# Altium PCB PCB_MachMQ3.PcbDoc
Units mil, origin at the board's own origin, x right, y up, seen from the top; angles counter-clockwise.
Board outline 1880 x 3625 mil, 2 copper layers (Top Layer, Bottom Layer); 27 components, 21 nets, 108 pads, 9 vias.
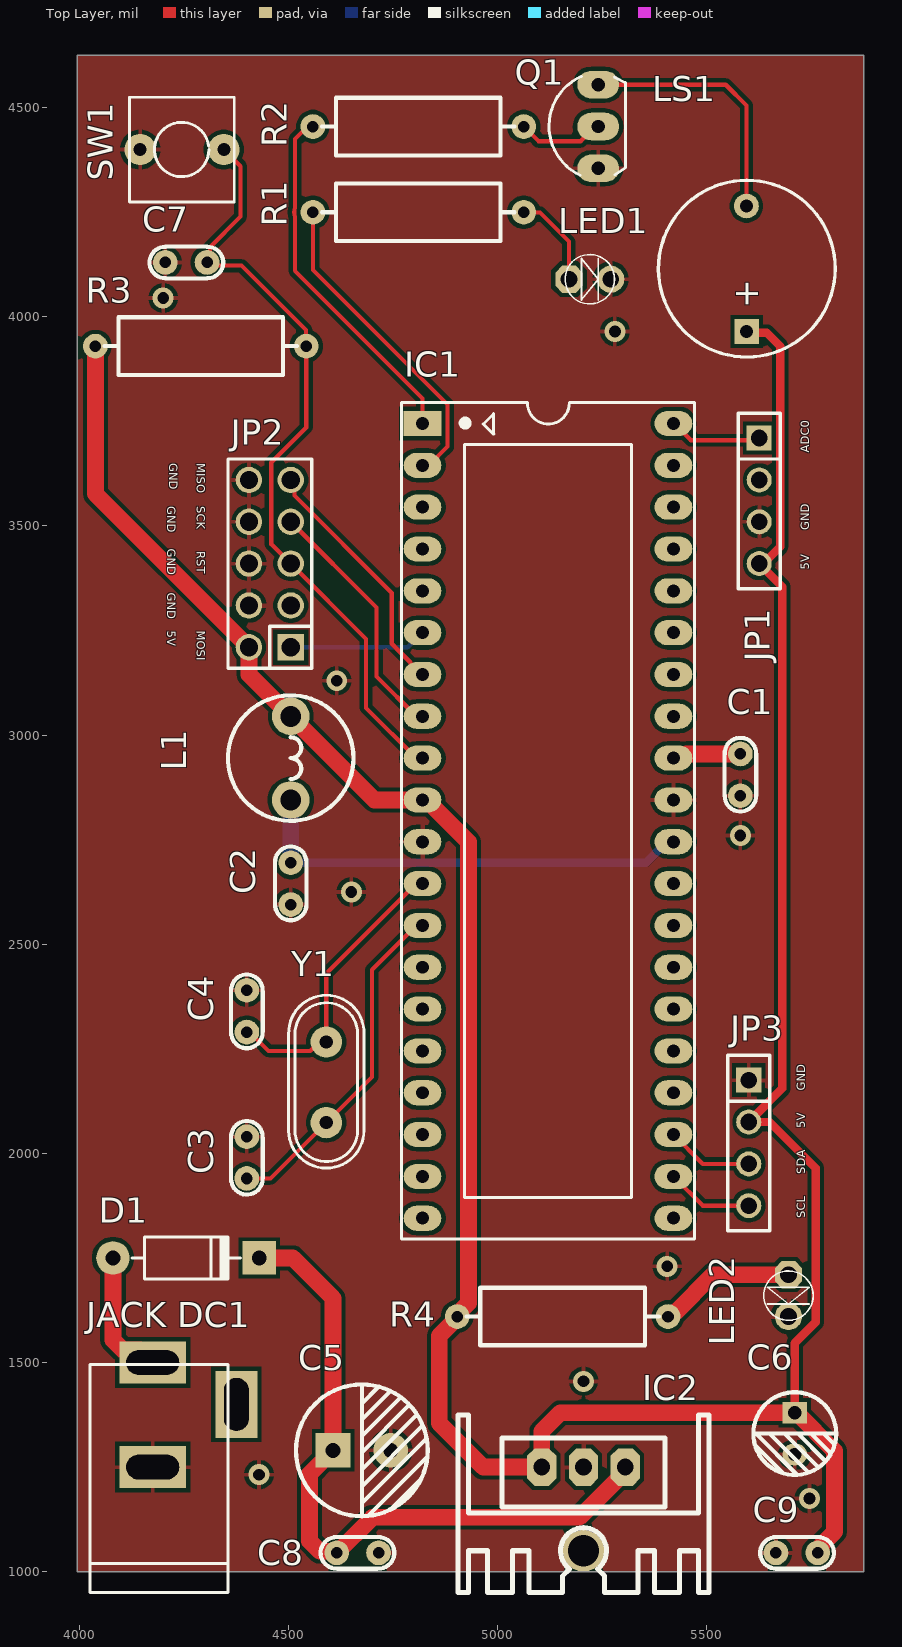
[diagram p0: Top Layer view]
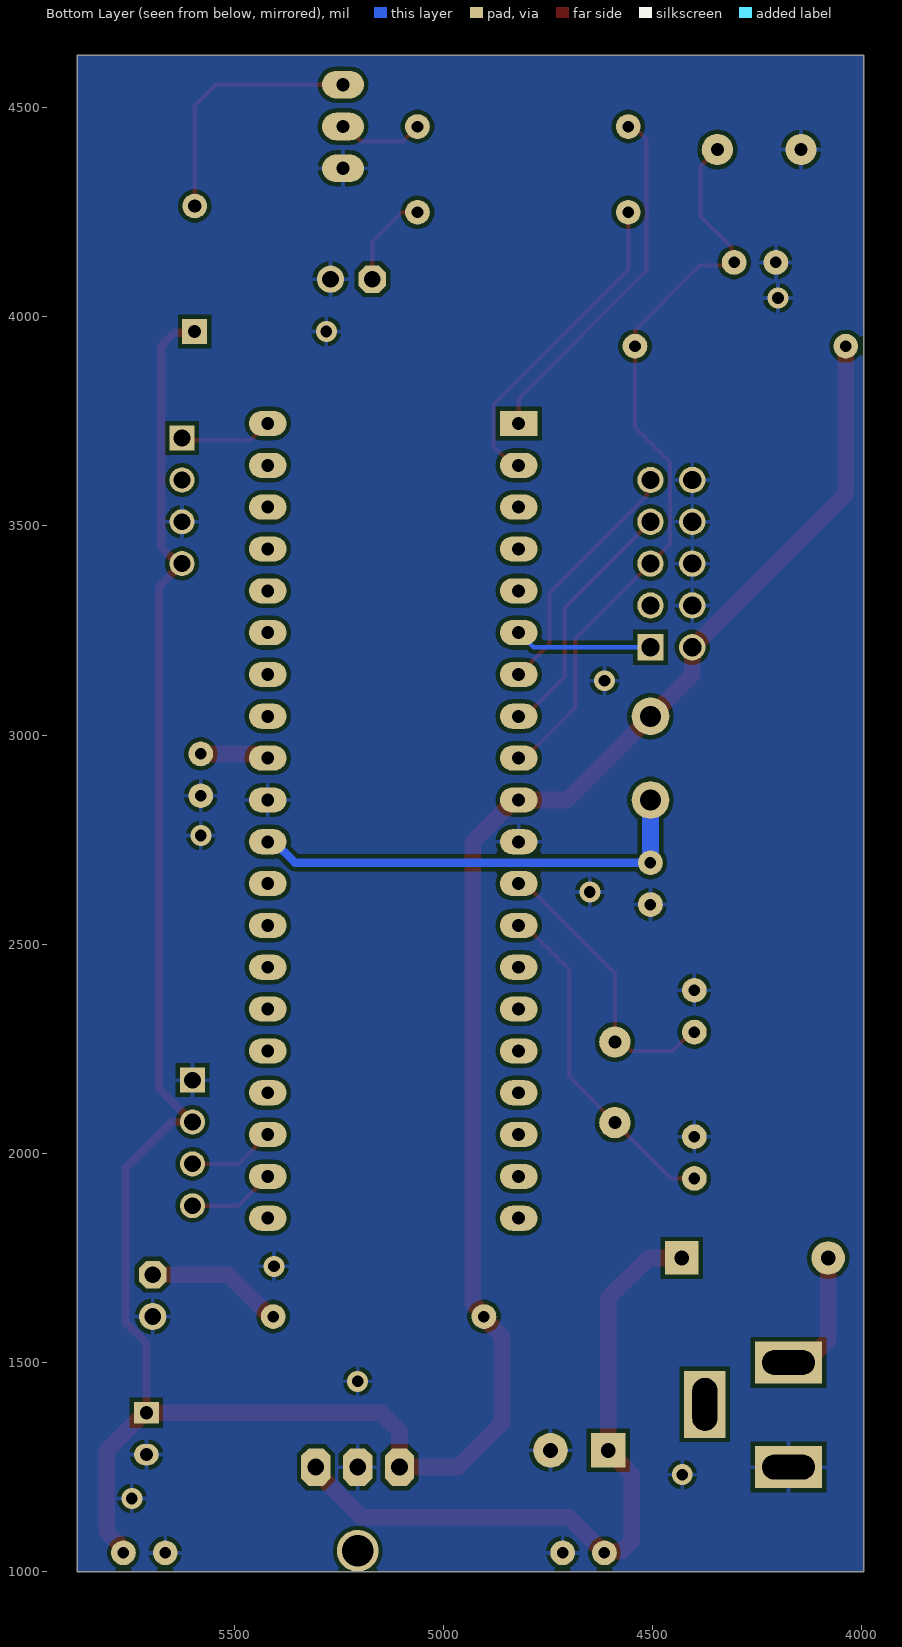
[diagram p1: Bottom Layer view, seen from below]
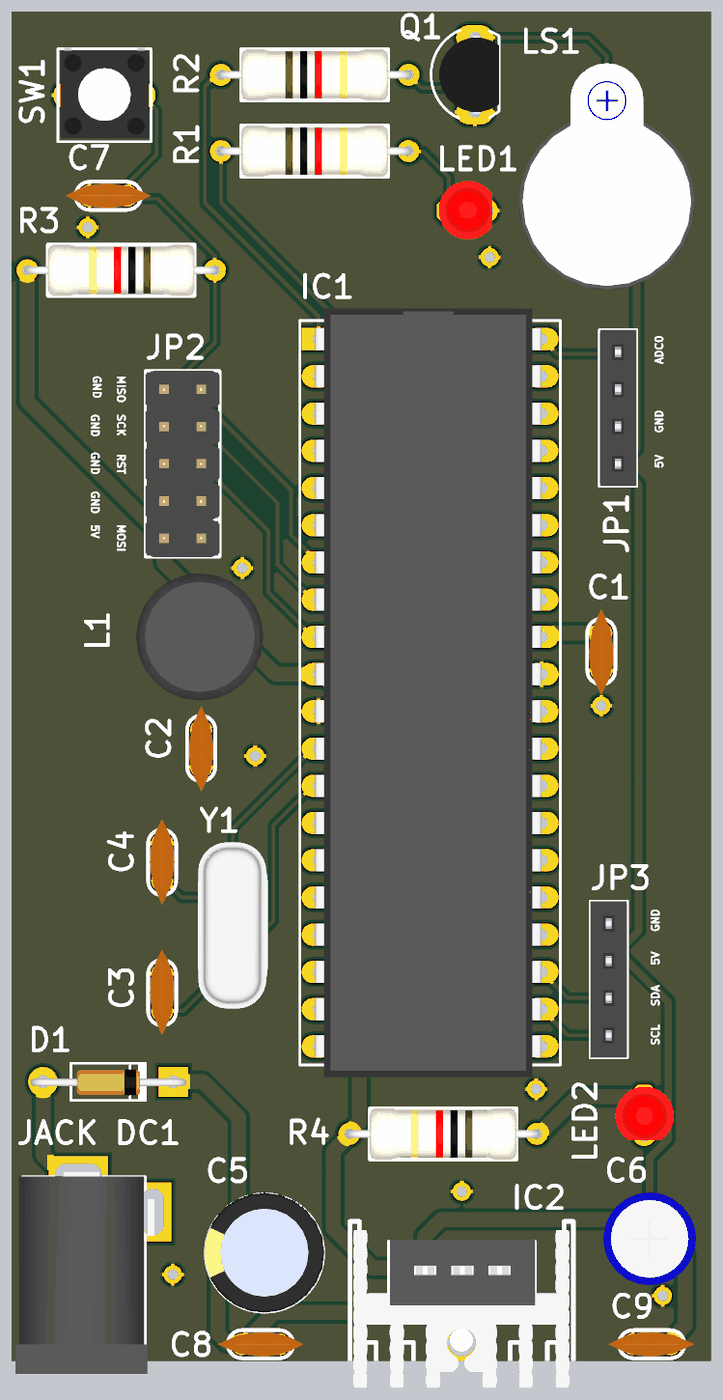
[diagram p2: 3D render of the assembled board from above, using the file's embedded part models]

## Layer stack, top to bottom
Top Solder: solder mask 0.4, Solder Resist, Dk 3.5
Top Layer: signal copper 1.4
Dielectric 1: dielectric 12.6, FR-4, Dk 4.8
Bottom Layer: signal copper 1.4
Bottom Solder: solder mask 0.4, Solder Resist, Dk 3.5

## Board outline
3995,1000 5875,1000 5875,4625 3995,4625

## Design rules (kind name [scope] priority, off if disabled: settings)
Clearance [All] p1: gap=10 ignorepadtopadclearanceinfootprint=FALSE
PolygonConnect [All] p1: connectstyle=Relief reliefconductorwidth=10 reliefentries=4 polygonreliefangle="90 Angle" airgapwidth=10
RoutingVias [All] p1: holewidth=15 width=30 viastyle="Through Hole" minholewidth=10 minwidth=20 maxholewidth=28 maxwidth=50
SolderMaskExpansion [All] p1: expansion=4 istentingtop=FALSE
SupplyNets "Schematic Supply Nets_1" [InNet('GND')] p1: voltage=0.000
SupplyNets "Schematic Supply Nets" [InNet('5V')] p2: voltage=0.000
Width [All] p1: maxlimit=40 minlimit=10 preferedwidth=20 minimp=50.000000 maximp=50.000000 favimp=50.000000
30 further rules are at their usual default settings.

## Components (designator, comment, footprint, x,y, rotation, side; value= is the part's Value field where it differs from the comment)
C1 "104" "tu gom" 5580,2905 r270 top
C2 "104" "tu gom" 4505,2645 r270 top
C3 "22pF" "tu gom" 4400,1990 r90 top
C4 "22pF" "tu gom" 4400,2340 r90 top
C5 "470uF" "tu hoa 8mm" 4675,1290 r0 top
C6 "47uF" "tu hoa 5mm" 5710,1330 r270 top
C7 "104" "tu gom" 4255,4130 r180 top
C8 "104" "tu gom" 4665,1045 r0 top
C9 "104" "tu gom" 5715,1045 r180 top
D1 "1N4007" D1A 4080,1750 r180 top
IC1 "ATMEL 16A" DIP40/W0.6 4820,3745 r270 top value="Atmega 16L"
IC2 "LM7805" QTO-220H3 5305,1250 r180 top
"JACK DC1" "JACK DC 5.5" "JACK DC 5.5" 4275,1375 r90 top value="Jac DC"
JP1 "JP 1x4 2.54" "JP 1x4 CT" 5625,3710 r270 top
JP2 "JP 2x5 2.54" "JP 2x5 DT" 4455,3410 r90 top
JP3 "JP 1x4 2.54" "JP 1x4 CT" 5600,2175 r270 top
L1 "100uH 3A" "CUON CAM 100uH3A" 4505,2945 r270 top
LED1 "LED" LED-3MM-RED 5170,4090 r0 top value="LED 3 ly Single Colour"
LED2 "LED" LED-3MM-RED 5695,1710 r270 top value="LED 3 ly Single Colour"
LS1 "Coi Chip Speaker" "Coi Chip Speacker" 5595,3965 r90 top
Q1 "2N222" TO92-123 5240,4455 r90 top value=C1815
R1 "330R" "tro vach 1/2w" 4810,4250 r0 top
R2 "1k" "tro vach 1/2w" 4810,4455 r0 top
R3 "10k" "tro vach 1/2w" 4290,3930 r180 top
R4 "330R" "tro vach 1/2w" 5155,1610 r180 top
SW1 "SW" SW2 4145,4400 r0 top value="SW chip 2 pin"
Y1 "16Mhz" "Thach Anh 2 chan cam" 4590,2170 r270 top value=4Mhz

## Footprints (in the part's own frame and the unit in brackets; to place one, negate y for a bottom-side part, rotate by r counter-clockwise, add the part's x,y. Pads: shape width x height; smd on the part's side, far side on the other; paste and mask are expansions set on the pad)
"Coi Chip Speacker" [mm]
  rect 1.5x1.5 hole 0.8: 1(0,0)
  round 1.5 hole 0.8: 2(7.62,0.013)
  silkscreen extent -1.55,-5.38 9.18,5.36, body extent -2.22,-6 13.24,6, height 4.5
"CUON CAM 100uH3A" [mil] "100uH3A"
  round 90 hole 50: 1(-100,0) 2(100,0)
  silkscreen extent -150,-150 150,150, body extent -171,-175 171,167, height 394
D1A [mil] "Diode 1A, W 100mil, L 350mil"
  round 80 hole 35: 1(0,0)
  rect 80x80 hole 35: 2(-350,0)
  silkscreen extent -305,-50 -45,50, body extent -386,-33 34,36, height 84
DIP40/W0.6 [mil] "40 PIN, W 600mil, Pin to pin 100mil"
  rect 60x90 hole 31: 1(0,0)
  oval 60x90 hole 31: 2(100,0) 3(200,0) 4(300,0) 5(400,0) 6(500,0) 7(600,0) 8(700,0) 9(800,0) 10(900,0) 11(1000,0) 12(1100,0) 13(1200,0) 14(1300,0) 15(1400,0) 16(1500,0) 17(1600,0) 18(1700,0) 19(1800,0) 20(1900,0) 21(1900,600) 22(1800,600) 23(1700,600) 24(1600,600) 25(1500,600) 26(1400,600) 27(1300,600) 28(1200,600) 29(1100,600) 30(1000,600) 31(900,600) 32(800,600) 33(700,600) 34(600,600) 35(500,600) 36(400,600) 37(300,600) 38(200,600) 39(100,600) 40(0,600)
  silkscreen extent -50,-50 1950,650, body extent -82,-10 1982,600, height 224
"JACK DC 5.5" [mil] "Jac DC input"
  rect 100x160 hole 59.06 slot 125.98 at 90 deg: 1(125,100) 2(-125,100)
  rect 160x100 hole 59.06 slot 125.98 at 0 deg: 3(25,-100)
  silkscreen extent -425,-80 120,250, body extent -410,-105 134,269, height 434
"JP 1x4 CT" [mm]
  rect 1.52x1.52 hole 1.02: 1(0,0)
  round 1.52 hole 1.02: 2(2.54,0) 3(5.08,0) 4(7.62,0)
  silkscreen extent -1.52,-1.27 9.14,1.27, body extent -1.52,-1.25 9.14,1.25, height 8.51
"JP 2x5 DT" [mm] "10 pins, dual pin, straight, gold plating"
  rect 1.6x1.6 hole 1.1: 1(-5.08,-1.27)
  round 1.6 hole 1.1: 2(-2.54,-1.27) 3(0,-1.27) 4(2.54,-1.27) 5(5.08,-1.27) 6(5.08,1.27) 7(2.54,1.27) 8(0,1.27) 9(-2.54,1.27) 10(-5.08,1.27)
  silkscreen extent -6.35,-2.54 6.35,2.54, body extent -6.35,-2.54 6.35,2.54, height 8.55
LED-3MM-RED [mil]
  oct 65x65 hole 40: 1(0,0)
  round 65 hole 40: 2(100,0)
  silkscreen extent -9,-59 109,59, body extent -27,-77 117,80, height 181
QTO-220H3 [mil] "TO-220 1-2-3"
  oct 70x90 hole 40: 1(0,0) 2(100,0) 3(200,0)
  round 100 hole 75: ""(100,200)
  silkscreen extent -200,-125 400,300, body extent -190,-102 392,323, height 984
SW2 [mil] "SW button 2pin, 250x 250 mil"
  round 75 hole 31: 1(0,0) 2(200,0)
  silkscreen extent -25,-125 225,125, body extent -18,-116 218,128, height 197
"Thach Anh 2 chan cam" [mm]
  round 1.905 hole 0.8: 1(-2.45,0) 2(2.45,0)
  silkscreen extent -5.28,-2.29 5.21,2.29, body extent -5.68,-2.36 5.68,2.29, height 3.5
TO92-123 [mil] "TO-92"
  oval 66x100 hole 32: 1(-100,0) 2(0,0) 3(100,0)
  silkscreen extent -117,-65 120,118, body extent -109,-66 109,95, height 245
"tro vach 1/2w" [mm]
  round 1.5 hole 0.7: 1(-6.4,0) 2(6.4,0)
  silkscreen extent -5.84,-1.75 5.84,1.75, body extent -6.62,-1.75 6.62,1.75, height 3.5
"tu gom" [mm] "Tu gom mini"
  round 1.5 hole 0.7: 1(-1.27,0) 2(1.27,0)
  silkscreen extent -2.25,-0.97 2.22,0.97, body extent -2.92,-0.85 2.92,0.85, height 6.12
"tu hoa 5mm" [mm]
  rect 1.3x1.5 hole 0.8: 1(-1.27,0)
  oval 1.3x1.5 hole 0.8: 2(1.27,0)
  silkscreen extent -2.51,-2.51 2.51,2.51, body extent -3.12,-3.18 3.23,3.18, height 14.55
"tu hoa 8mm" [mm]
  rect 2.1x2.1 hole 0.9: 1(-1.75,0)
  round 2.1 hole 0.9: 2(1.75,0)
  silkscreen extent -4,-4 4,4, body extent -4.1,-4.07 4.1,4.13, height 13.81

## Part data
C1 C2 C7 C8 C9: library part "Tu gom 104 50V", "Cắm", Chung_Loai=Cắm, Don_Vi=Con, Ma_Hang=MH004761, So_Chan=2, Ten_Linh_Kien="Tụ gốm 104 100nF 50V"
C3 C4: library part "Tu gom 22pF 50V", "Cắm", Chung_Loai=Cắm, Don_Vi=Con, Ma_Hang=MH004771, So_Chan=2, Ten_Linh_Kien="Tụ gốm 22P 50V"
C5: library part "Tu Hoa 470uF 16V 8x11", "Cắm", Chung_Loai=Cắm, Don_Vi=Con, Ma_Hang=MH006550, So_Chan=2, Ten_Linh_Kien="Tụ Hóa 470uF 16V 8x11MM"
C6: library part "Tu Hoa 47uF 16V 5x10", "Cắm", Chung_Loai=Cắm, Don_Vi=Con, Ma_Hang=MH006859, So_Chan=2, Ten_Linh_Kien="Tụ Hóa 47uF 16V"
D1: library part D1A, "Diode 1A"
IC1: library part ATmega16A-PU, "8-Bit AVR Microcontroller with 16K Bytes of In-System Programmable Flash Memory"
IC2: library part LM78xx, "On ap +, from + 5 to + 24VDC"
JP1 JP3: library part "JP 1x4 2.54 Cai Thang", "Cắm", Chung_Loai=Cắm, Don_Vi=Con, Ma_Hang=MH004006, Ten_Linh_Kien="Jump Đơn Cái 2.54MM 1x20P Thẳng"
JP2: library part "JP 2x5 2.54 Duc Thang", "Cắm", Chung_Loai=Cắm, Don_Vi=Con, Ma_Hang=MH002686, Ten_Linh_Kien="Jump Đôi Đực 2.54MM 2x40P Thẳng 11MM"
L1: library part "CUON CAM 100uH DIP", "Dán", Chung_Loai=Dán, Don_Vi=Con, Ma_Hang=MH002209, Ten_Linh_Kien="Cuộn Cảm 100uH 3A 8x10MM"
LED1 LED2: "LED Single colour Green and Red"
LS1: "Còi chip"
Q1: "NPN 600mW, ECB"
R1 R4: library part "Tro Vach 1/2W 5% 330R", "Cắm", Chung_Loai=Cắm, Don_Vi=Con, Ma_Hang=MH006204, So_Chan=2, Ten_Linh_Kien="Trở 5% 1/2w 330R"
R2: library part "Tro Vach 1/2W 5% 1k", "Cắm", Chung_Loai=Cắm, Don_Vi=Con, Ma_Hang=MH007240, So_Chan=2, Ten_Linh_Kien="Trở 5% 1/2w 1K"
R3: library part "Tro Vach 1/2W 5% 10k", "Cắm", Chung_Loai=Cắm, Don_Vi=Con, Ma_Hang=MH006206, So_Chan=2, Ten_Linh_Kien="Trở 5% 1/2w 10k"
SW1: library part SW2, "Switch button 2 pin"
Y1: library part "Thach Anh 2 chan Cam", "Crystal For all Crystal 2pin."

## Via types
v1: diameter 50, hole 28, Top Layer to Bottom Layer, 9 vias

## Nets (pads, with @x,y where several pads share a name; then routed paths per layer and width w, separated by ;. In a path a pad name is that pad's centre, name@x,y a point inside that pad or via, vN(x,y) a via of type N, cw(c..) or ccw(c..) an arc to the next point about the centre after c; other vN are vias at no path point)
5V: C6.1 C9.1 IC1.10 IC2.3 JP1.4 JP2.10 JP3.2 L1.1 LS1.1 R3.2 R4.2 | length 7278.9
  Top Layer w20: LS1.1 5597.81,3962.19 5642.81,3962.19 5674.92,3930.08 5674.92,3449.92 5635,3410 JP1.4 5680,3355 5680,2155 JP3.2 5650,2075 5760,1965 5760,1596.31 5710,1546.31 C6.1
  Top Layer w40: R3.2 4038.03,3576.97 JP2.10 4405,3145 4705,2845 IC1.10 4829.59,2845 4930,2744.59 4930,1642.12 4903.03,1615.16 R4.2 ; R4.2@4903.03,1606.81 4860,1563.77 4860,1355 4965,1250 IC2.3 5105,1335 5150,1380 C6.1 5713.94,1380 5805,1288.94 5805,1095.16 5774.53,1064.68 5774.53,1059.68 5760,1045.16 C9.1@5760,1045
ADC0: IC1.40 JP1.1 | length 227.8
  Top Layer w10: IC1.40 5421.47,3745 5461.47,3705 5610,3705 JP1.1@5625,3720
GND: "JACK DC1.2" C1.2 C2.2 C3.2 C4.2 C5.2 C6.2 C7.2 C8.2 C9.2 IC1.11 IC1.31 IC2.2 JP1.3 JP2.6 JP2.7 JP2.8 JP2.9 JP3.1 LED1.2 LED2.2 Q1.1 SW1.1
  other v1: 5745,1175 4428.95,1231.99 5205,1455 5405,1730 4650,2625 5580,2760 4615,3130 5280,3965 4200,4045
MISO: IC1.7 JP2.5 | length 596.3
  Top Layer w10: JP2.5 4513.65,3601.35 4513.65,3572.9 4746.55,3340 4746.55,3218.45 4790.68,3174.32 4790.68,3172.85 4818.53,3145 IC1.7
MOSI: IC1.6 JP2.1 | length 330.2
  Bottom Layer w10: JP2.1 4784.64,3210 4795.43,3220.79 4795.43,3221.9 4818.53,3245 IC1.6
NetC1_1: C1.1 IC1.32 | length 164.1
  Top Layer w40: IC1.32 5440.41,2945 5450.41,2955 C1.1
NetC2_1: C2.1 IC1.30 L1.2 | length 1094.7
  Top Layer w40: L1.2 L1.2@4511.35,2838.65
  Bottom Layer w20: C2.1 5355,2695 5405,2745 IC1.30
  Bottom Layer w40: C2.1 L1.2
NetC5_1: C5.1 C8.1 D1.2 IC2.1 | length 1677.1
  Top Layer w40: D1.2 4510,1750 4606.1,1653.9 C5.1 4550,1233.9 4550,1073.47 4574.83,1048.65 4611.35,1048.65 C8.1 4700,1130 5195,1130 5305,1240 IC2.1
NetD1_1: "JACK DC1.1" D1.1 | length 313.7
  Top Layer w40: D1.1 4080,1553.43 4103.43,1530 4145,1530 4175,1500
NetLED1_1: LED1.1 R1.2 | length 227
  Top Layer w10: R1.2 5062.61,4249.36 5100.64,4249.36 5170,4180 LED1.1
NetLED2_1: LED2.1 R4.1 | length 329.5
  Top Layer w40: R4.1 5412.12,1610 5421.65,1619.53 5424.53,1619.53 5515,1710 LED2.1
NetLS1_2: LS1.2 Q1.3 | length 615.5
  Top Layer w10: Q1.3 5545,4555 5594.5,4505.5 LS1.2
NetQ1_2: Q1.2 R2.2 | length 207
  Top Layer w10: R2.2 5096.97,4420 5198.4,4420 5233.4,4455 Q1.2
PB0: IC1.1 R2.1 | length 860.1
  Top Layer w10: R2.1@4535.61,4445.61 4515,4425 4515,4261.45 ccw(c4558.03,4250) 4515,4238.55 4515,4110 4517.93,4107.07 4820,3805 IC1.1 ; R2.1@4535.63,4445.62 R2.1
PB1: IC1.2 R1.1 | length 772
  Top Layer w10: R1.1 4558.03,4111.97 4880,3790 4880,3690 4835,3645 IC1.2
RESET: C7.1 IC1.9 JP2.3 R3.1 SW1.2 | length 1839.9
  Top Layer w10: SW1.2 4385,4360 4385,4239.79 4311.59,4166.38 4311.59,4136.59 C7.1 4312.56,4122.44 4387.56,4122.44 4541.33,3968.67 4541.33,3930.64 R3.1 4541.97,3735.51 4458.5,3652.05 4458.5,3456.5 JP2.3 4685,3230 4685,3065 4805,2945 IC1.9
SCK: IC1.8 JP2.4 | length 604.3
  Top Layer w10: JP2.4 4710,3305 4710,3140 4805,3045 IC1.8
SCL: IC1.22 JP3.4 | length 209
  Top Layer w10: IC1.22 5490,1875 JP3.4
SDA: IC1.23 JP3.3 | length 209
  Top Layer w10: IC1.23 5490,1975 JP3.3
XTAL1: C3.1 IC1.13 Y1.2 | length 820.8
  Top Layer w10: C3.1 4456.46,1940 4698.94,2182.48 4698.94,2438.94 4805,2545 IC1.13
XTAL2: C4.1 IC1.12 Y1.1 | length 700.1
  Top Layer w10: C4.1 4406.84,2290 4451.84,2245 4551.64,2245 4573.1,2266.46 Y1.1 4590,2430 4805,2645 IC1.12
pads on no net: "JACK DC1.3" IC1.3 IC1.4 IC1.5 IC1.14 IC1.15 IC1.16 IC1.17 IC1.18 IC1.19 IC1.20 IC1.21 IC1.24 IC1.25 IC1.26 IC1.27 IC1.28 IC1.29 IC1.33 IC1.34 IC1.35 IC1.36 IC1.37 IC1.38 IC1.39 IC2. JP1.2 JP2.2

## Polygon pours and split planes (outlines as drawn)
GND on Bottom Layer "GND_L02_P000" (solid, remove dead copper, pour order 0): 3995,1000 5875,1000 5875,4625 3995,4625
GND on Top Layer "GND_L01_P002" (solid, remove dead copper, pour order 2): 3995,1000 5875,1000 5875,4625 3995,4625

## Silkscreen, mask and mechanical layers (free items; w line width, h text height)
Top Overlay:
  text "ADC0" at 5745,3675 h20 r90
  text "GND" at 4215,3650 h20 r270
  text "MISO" at 4280,3650 h20 r270
  text "GND" at 4210,3546.68 h20 r270
  text "SCK" at 4280,3546.68 h20 r270
  text "GND" at 5745,3490 h20 r90
  text "GND" at 4210,3445 h20 r270
  text "RST" at 4280,3440 h20 r270
  text "5V" at 5745,3395 h20 r90
  text "GND" at 4210,3340 h20 r270
  text "5V" at 4210,3250 h20 r270
  text "MOSI" at 4280,3250 h20 r270
  text "GND" at 5735,2150 h20 r90
  text "5V" at 5735,2060 h20 r90
  text "SDA" at 5735,1950 h20 r90
  text "SCL" at 5735,1845 h20 r90

## Text inside footprints (layer, text, board x,y; h text height)
LS1: Top Overlay "+" at 5623,4020.5 h60 r90